# Altium PCB CAN_MAX3051.PcbDoc
Units mil, origin at the board's own origin, x right, y up, seen from the top; angles counter-clockwise.
Board outline 1310 x 730 mil, 2 copper layers (Top Layer, Bottom Layer); 10 components, 9 nets, 30 pads, 6 vias.
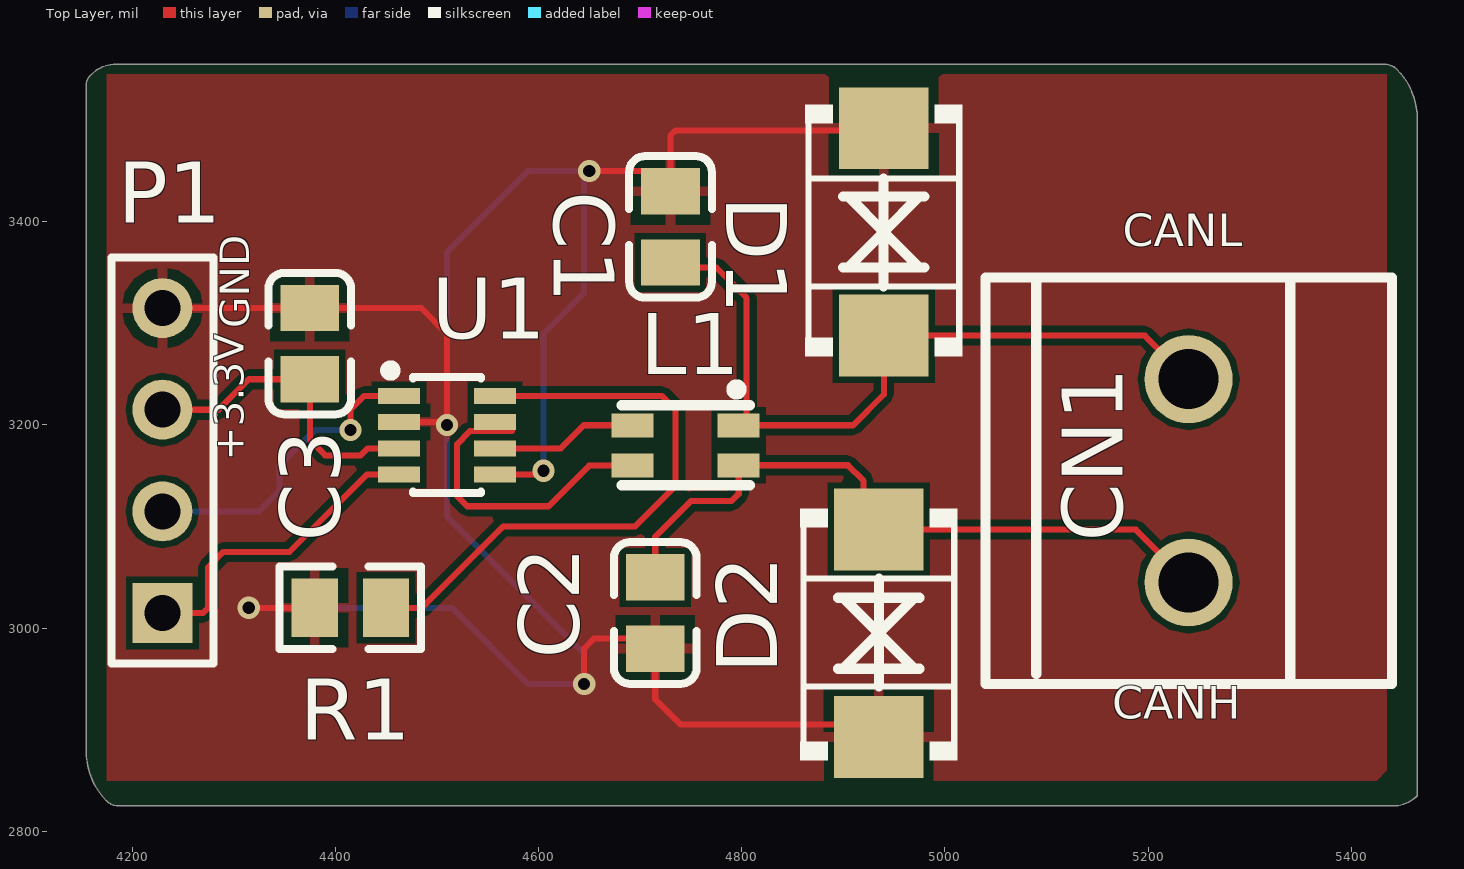
[diagram p0: Top Layer view]
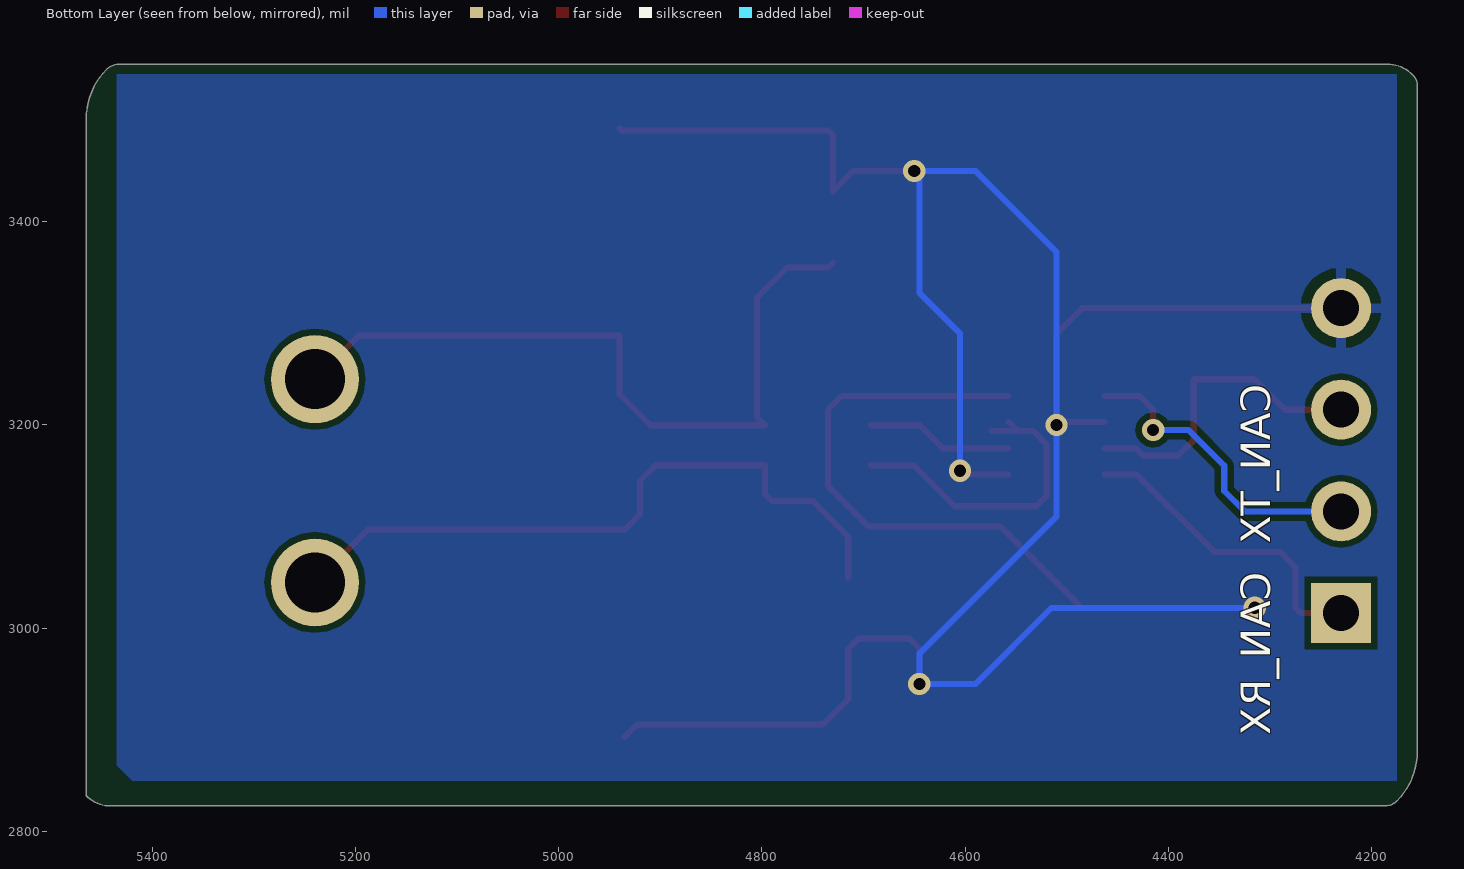
[diagram p1: Bottom Layer view, seen from below]

## Layer stack, top to bottom
Top Solder: solder mask 0.4, Solder Resist, Dk 3.5
Top Layer: signal copper 1.4
Dielectric 1: dielectric 12.6, FR-4, Dk 4.8
Bottom Layer: signal copper 1.4
Bottom Solder: solder mask 0.4, Solder Resist, Dk 3.5

## Board outline
4175,2830 ccw(c4187.07,2842.07) 4187.07,2825 5440.86,2825 ccw(c5440.86,2859.14) 5465,2835 5465,3501.72 ccw(c5396.72,3501.72) 5445,3550 ccw(c5432.93,3537.93) 5432.93,3555 4184.14,3555 ccw(c4184.14,3520.86) 4160,3545 4158.54,3543.54 ccw(c4167.07,3535) 4155,3535 4155,2878.28 ccw(c4223.28,2878.28)

## Design rules (kind name [scope] priority, off if disabled: settings)
Clearance [All] p1: gap=6 ignorepadtopadclearanceinfootprint=FALSE
PolygonConnect [All] p1: thpad.connectstyle=Relief thpad.reliefconductorwidth=10 thpad.reliefentries=4 thpad.polygonreliefangle="90 Angle" thpad.airgapwidth=10 smdpad.connectstyle=Relief smdpad.reliefconductorwidth=10 smdpad.reliefentries=4 smdpad.polygonreliefangle="90 Angle" smdpad.airgapwidth=10 via.connectstyle=Direct via.reliefconductorwidth=10 via.reliefentries=4 via.polygonreliefangle="90 Angle" via.airgapwidth=10
RoutingVias [All] p1: holewidth=28 width=50 viastyle="Through Hole" minholewidth=28 minwidth=50 maxholewidth=28 maxwidth=50
SolderMaskExpansion [All] p1: expansion=4
Width [All] p1: maxlimit=10 minlimit=6 preferedwidth=6
30 further rules are at their usual default settings.

## Components (designator, comment, footprint, x,y, rotation, side; value= is the part's Value field where it differs from the comment)
C1 "100pF(101) ±5% 630V" 0805_C 4730,3394.96 r270 top
C2 "100pF(101) ±5% 630V" 0805_C 4715,3014.96 r90 top
C3 "0.1uF" 0805_C 4375,3280.04 r270 top
CN1 "1729128" CONN-TH_2P-P5.08_1714984 5240,3145 r90 top
D1 "SMBJP6KE6.8CA-TP" SMB_L4.6-W3.6-LS5.3-BI 4940,3390 r270 top
D2 "SMBJP6KE6.8CA-TP" SMB_L4.6-W3.6-LS5.3-BI 4935,2995 r90 top
L1 "WCM-3216-102T" FILTER-SMD_1206-4P-L3.2-W1.6-BL-CW 4745,3180 r180 top
P1 "Header 4" HDR1X4 4230,3015 r90 top
R1 "20KΩ(2002) ±1%" 0805_R 4414.96,3020 r0 top
U1 "MAX3051EKA+T" SOT-23-8_L3.0-W1.7-P0.65-LS2.8-TL 4510,3190 r0 top

## Footprints (in the part's own frame and the unit in brackets; to place one, negate y for a bottom-side part, rotate by r counter-clockwise, add the part's x,y. Pads: shape width x height; smd on the part's side, far side on the other; paste and mask are expansions set on the pad)
0805_C [mm]
  rect 1.16x1.47 smd: 1(-0.89,0) 2(0.89,0)
  silkscreen extent -1.77,-1.04 1.77,1.04, body extent -1,-0.62 1,0.63, height 0.77
0805_R [mm]
  rect 1.16x1.47 smd: 1(-0.89,0) 2(0.89,0)
  silkscreen extent -1.77,-1.04 1.77,1.03, body extent -1,-0.62 1,0.63, height 0.49
CONN-TH_2P-P5.08_1714984 [mm]
  round 2.2 hole 1.5: 1(-2.54,0) 2(2.54,0)
  silkscreen extent -5.08,-5.08 5.08,5.08
FILTER-SMD_1206-4P-L3.2-W1.6-BL-CW [mm]
  rect 1.05x0.6 smd: 1(-1.325,-0.5) 2(-1.325,0.5) 3(1.325,0.5) 4(1.325,-0.5)
  silkscreen extent -1.6,-1.52 1.6,1
HDR1X4 [mm] "Connector; Header; 4 Position"
  rect 1.5x1.5 hole 0.9: 1(0,0)
  round 1.5 hole 0.9: 2(2.54,0) 3(5.08,0) 4(7.62,0)
  silkscreen extent -1.27,-1.27 8.89,1.27
SMB_L4.6-W3.6-LS5.3-BI [mil]
  rect 80.61x88.23 smd: 1(-102.02,0) 2(102.02,0)
  silkscreen extent -125,-77 122,77
SOT-23-8_L3.0-W1.7-P0.65-LS2.8-TL [mm]
  rect 1.06x0.4 smd: 1(-1.2,0.98) 2(-1.2,0.33) 3(-1.2,-0.33) 4(-1.2,-0.98) 5(1.2,-0.98) 6(1.2,-0.33) 7(1.2,0.33) 8(1.2,0.98)
  silkscreen extent -1.54,-1.45 0.85,1.74

## Part data
C1 C2: library part "0805 1uF (105) 10% 50V", "贴片电容", BOM_Manufacturer=muRata, BOM_Manufacturer Part=GRM21A5C2J101JWA1D, Package=0805
C3: library part "0805 1uF (105) 10% 50V", "贴片电容", Package=0805, SuppliersPartNumber=GCM21BR72A104KA37L, Supplier=muRata
CN1: library part MKDSN1.5/2-5.08, BOM_Manufacturer="Phoenix Contact", BOM_Manufacturer Part=1729128
D1 D2: BOM_Manufacturer="MCC(Micro Commercial Components)", Package=SMB, BOM_Manufacturer Part=SMBJP6KE6.8CA-TP
L1: BOM_Manufacturer=Kingcore, BOM_Manufacturer Part=WCM-3216-102T, 可更换为=CC1812C513R-10
P1: "Header, 4-Pin", LatestRevisionDate=17-Jul-2002, LatestRevisionNote="Re-released for DXP Platform.", Publisher="Altium Limited"
R1: library part "0805 1KΩ (1001) 1%", "贴片电阻", BOM_Manufacturer=ROHM, BOM_Manufacturer Part=MCR10EZPF2002, Package=0805
U1: library part MAX3051EKA, BOM_Manufacturer=MAXIM, BOM_Manufacturer Part=MAX3051EKA+T

## Via types
v1: diameter 22, hole 12, Top Layer to Bottom Layer, 6 vias

## Nets (pads, with @x,y where several pads share a name; then routed paths per layer and width w, separated by ;. In a path a pad name is that pad's centre, name@x,y a point inside that pad or via, vN(x,y) a via of type N, cw(c..) or ccw(c..) an arc to the next point about the centre after c; other vN are vias at no path point)
+3.3V: C3.2 P1.3 U1.3 | length 314.3
  Top Layer w6: P1.3 4285,3215 4315,3245 C3.2 4375,3185 4390,3170 4425,3170 4432.01,3177.01 U1.3
CAN_RX: P1.1 U1.4 | length 312.7
  Top Layer w6: P1.1 4270,3015 4275,3020 4275,3060 4290,3075 4355,3075 4431.42,3151.42 U1.4
CAN_TX: P1.2 U1.1 | length 306.2
  Top Layer w6: v1(4415,3195) 4415,3215 4428.59,3228.59 U1.1
  Bottom Layer w6: P1.2 4325,3115 4345,3135 4345,3160 4380,3195 v1(4415,3195)
DGND: C1.1 C2.1 C3.1 D1.1 D2.1 P1.4 R1.1 U1.2 U1.5 | length 2626.6
  Top Layer w6: P1.4 4374.92,3315 C3.1 4484.92,3315.08 4510,3290 v1(4510,3200) 4507,3203 U1.2 ; v1(4315,3020) R1.1 ; U1.5 4601.42,3151.42 v1(4605,3155) ; v1(4645,2945) 4645,2980 4655,2990 4704.92,2990 C2.1 4715,2930 4740,2905 4922.98,2905 D2.1 ; v1(4650,3450) 4710,3450 C1.1 4730,3485 4735,3490 4937.98,3490 D1.1
  Bottom Layer w6: v1(4315,3020) 4515,3020 4590,2945 v1(4645,2945) 4645,2975 4510,3110 v1(4510,3200) 4510,3370 4590,3450 v1(4650,3450) 4645,3445 4645,3330 4605,3290 v1(4605,3155)
NetC1_2: C1.2 CN1.2 D1.2 L1.1 | length 749.2
  Top Layer w6: C1.2 4734.92,3355 4775,3355 4805,3325 4805,3207.51 L1.1 4909.68,3199.68 4940,3230 D1.2 5197.02,3287.98 CN1.2
NetC2_2: C2.2 CN1.1 D2.2 L1.2 | length 677.7
  Top Layer w6: C2.2 4715,3090 4750,3125 4790,3125 4797.16,3132.16 L1.2 4904.69,3160.31 4920,3145 4920,3112.02 D2.2 5187.98,3097.02 CN1.1
NetL1_3: L1.3 U1.7 | length 316.9
  Top Layer w6: U1.7 4548.12,3193.88 ; 4573.88,3193.88 4548.12,3193.88 ; L1.3 4692.52,3160 4650,3160 4610,3120 4530,3120 4520,3130 4520,3181.23 4532.65,3193.88 4548.12,3193.88
NetL1_4: L1.4 U1.6 | length 145
  Top Layer w6: U1.6 4622.01,3177.01 4644.68,3199.68 L1.4
NetR1_2: R1.2 U1.8 | length 593.1
  Top Layer w6: R1.2 4485,3020 4565,3100 4695,3100 4735,3140 4735,3215 4721.41,3228.59 U1.8

## Polygon pours and split planes (outlines as drawn)
DGND on Top Layer "Top Layer-No Net" (solid, remove dead copper, pour order 0): 4175,3545 5435,3545 5435,2860 5425,2850 4175,2850
DGND on Bottom Layer "Top Layer-No Net" (solid, remove dead copper, pour order 2): 4175,3545 5435,3545 5435,2865 5420,2850 4175,2850

## Silkscreen, mask and mechanical layers (free items; w line width, h text height)
Top Overlay:
  text "CANL" at 5175,3365 h55
  text "GND" at 4325,3295 h50 r90
  text "+3.3V" at 4320,3165 h50 r90
  text "CANH" at 5165,2900 h55
Bottom Overlay:
  text "CAN_TX" at 4290,3240 h50 r270
  text "CAN_RX" at 4290,3055 h50 r270
Mechanical 1:
  lines w10: 4155,2878.28 ccw(c4223.28,2878.28) 4175,2830 ccw(c4187.07,2842.07) 4187.07,2825 5440,2825 5440.86,2825 ccw(c5440.86,2859.14) 5465,2835 5465,3501.72 ccw(c5396.72,3501.72) 5445,3550 ccw(c5432.93,3537.93) 5432.93,3555 4185,3555 4184.14,3555 ccw(c4184.14,3520.86) 4160,3545 4158.54,3543.54 ccw(c4167.07,3535) 4155,3535 4155,3525 4155,2878.28